# Altium PCB PCB_DimmerBard.PcbDoc
Units mil, origin at the board's own origin, x right, y up, seen from the top; angles counter-clockwise.
Board outline 2165.35 x 1299.21 mil, 3 copper layers (Top Layer, Mid-Layer 2, Bottom Layer); 65 components, 108 nets, 189 pads, 58 vias.
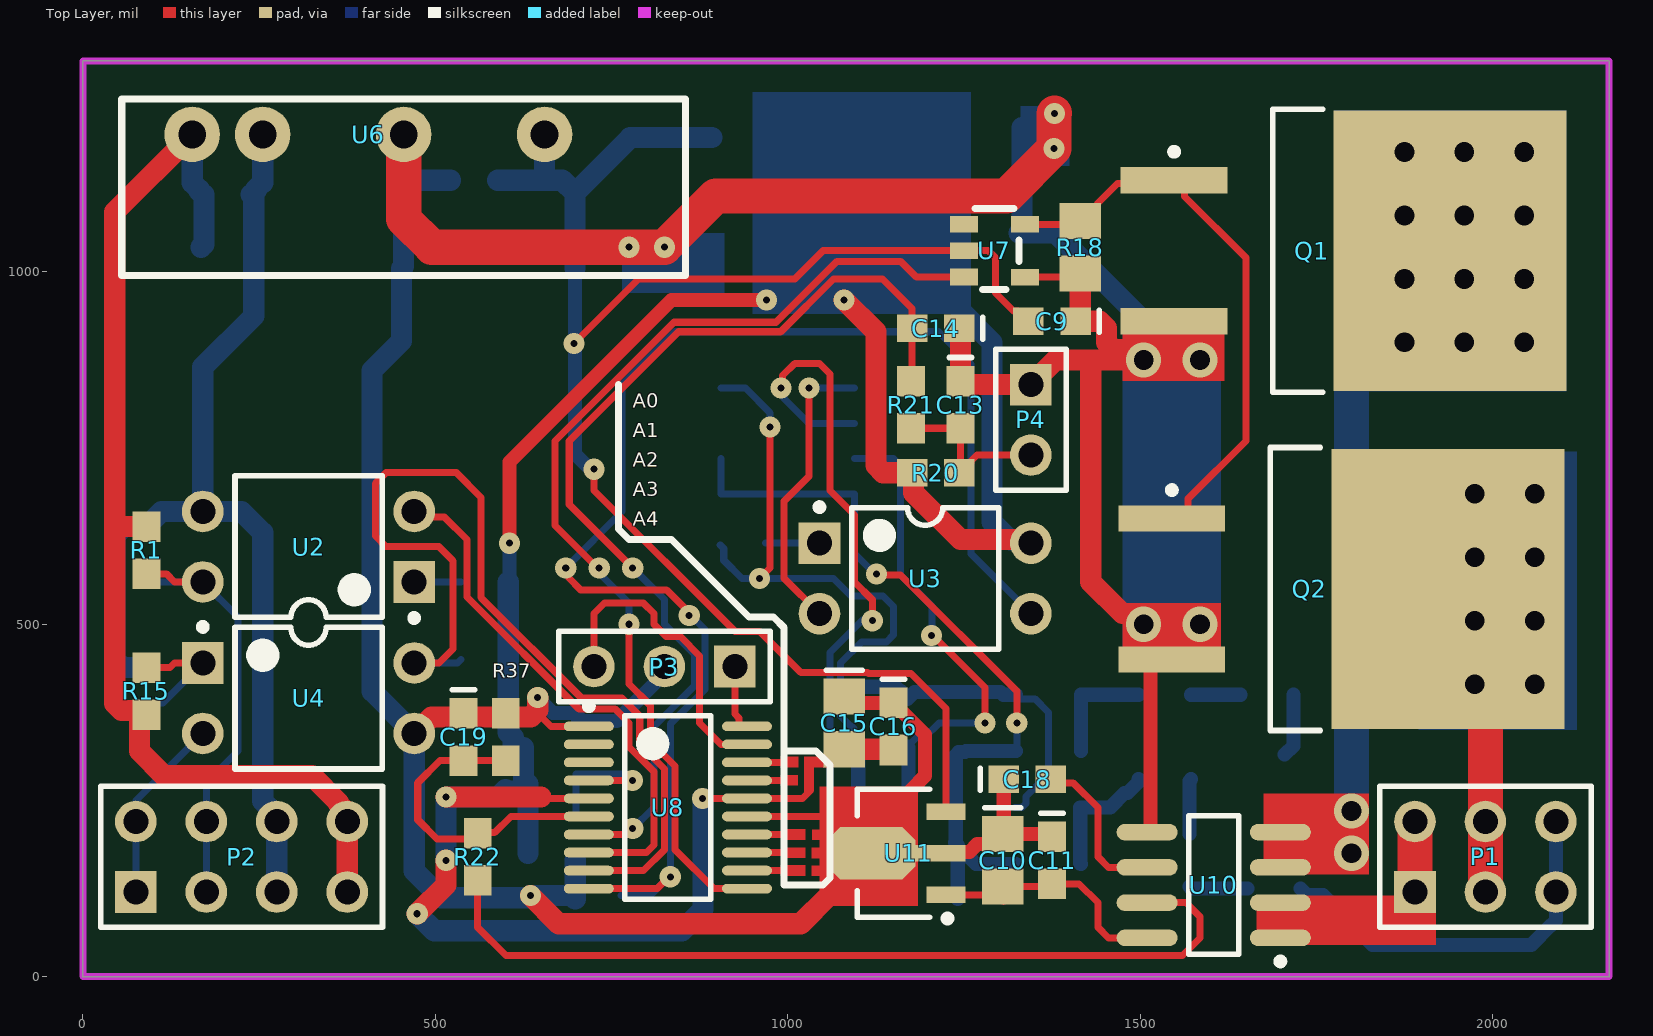
[diagram p0: Top Layer view]
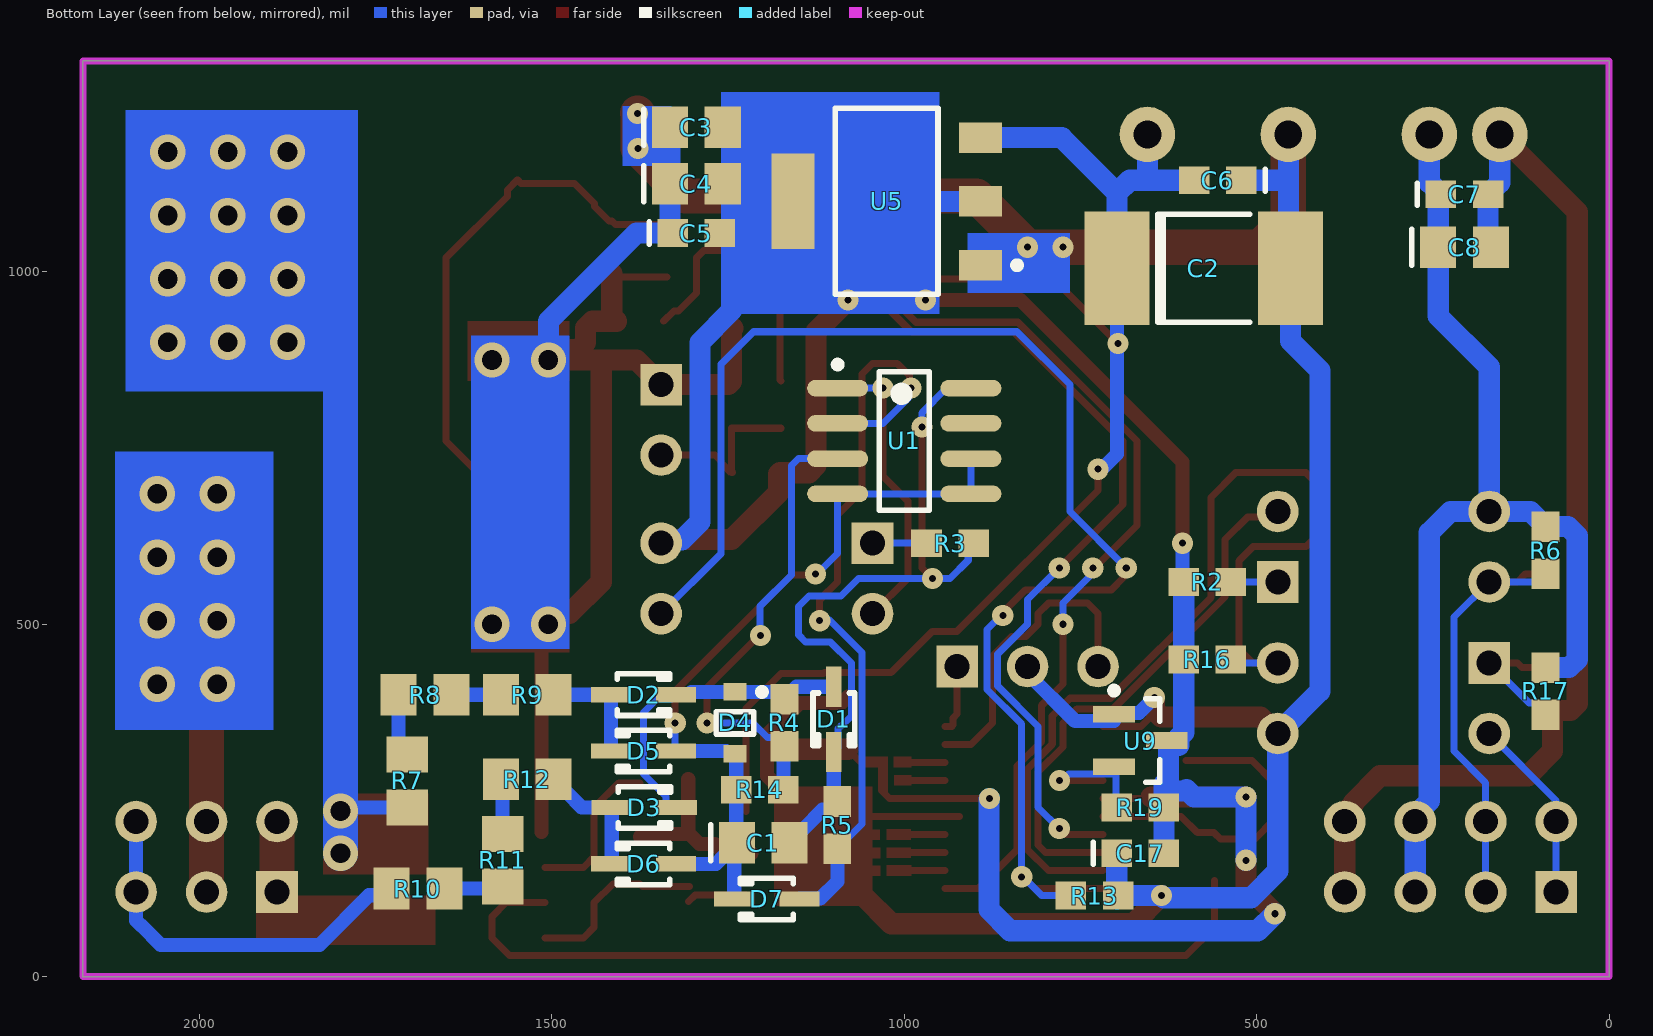
[diagram p1: Bottom Layer view, seen from below]

## Layer stack, top to bottom
Top Solder: solder mask 0.4, Solder Resist, Dk 3.5
Top Layer: signal copper 1.4
Dielectric 1: dielectric 12.6, FR-4, Dk 4.8
Mid-Layer 2: signal copper 1.4
Dielectric2: dielectric 12.6, FR-4, Dk 4.8
Bottom Layer: signal copper 1.4
Bottom Solder: solder mask 0.4, Solder Resist, Dk 3.5

## Board outline
0,0 0,1299.21 2165.35,1299.21 2165.35,0

## Design rules (kind name [scope] priority, off if disabled: settings)
BoardOutlineClearance [All] p1: gap=11.81 ignorepadtopadclearanceinfootprint=FALSE except(15.75: Arc-SplitBarrior Arc-SplitContinuation Track-SplitBarrior Track-SplitContinuation SMDPad-SplitBarrior SMDPad-SplitContinuation THPad-SplitBarrior THPad-SplitContinuation Via-SplitBarrior Via-SplitContinuation Fill-SplitBarrior Fill-SplitContinuation Poly-SplitBarrior Poly-SplitContinuation Region-SplitBarrior Region-SplitContinuation Text-SplitBarrior Text-SplitContinuation)
Clearance "Clearance Different Nets" [All] p1: gap=7.87 ignorepadtopadclearanceinfootprint=FALSE except(3.5: Arc-Arc Arc-Track Arc-SMDPad Track-Track Track-SMDPad; 5: SMDPad-SMDPad SMDPad-Via THPad-Via Via-Via; 10: Arc-Via Arc-Text Track-Via Track-Text SMDPad-Text THPad-Text Via-Text Fill-Text Poly-Text Region-Text Text-Text; 19.68: THPad-THPad Via-Hole)
Clearance "Clearance Same Nets" [All] p2: gap=7.87 ignorepadtopadclearanceinfootprint=FALSE except(3.5: Arc-Arc Arc-Track Arc-SMDPad Track-Track Track-SMDPad SMDPad-SMDPad; 5: SMDPad-Via THPad-Via; 10: Arc-Via Arc-Text Track-Via Track-Text SMDPad-Text THPad-Text Via-Via Via-Text Fill-Text Poly-Text Region-Text Text-Text)
Clearance "Clearance Bottom Layer" [OnLayer('Bottom Layer')] p3: gap=8 ignorepadtopadclearanceinfootprint=TRUE except(10: Arc-Text Track-Text SMDPad-Text THPad-Text Via-Text Fill-Text Poly-Text Region-Text Text-Text)
Clearance "Clearance Top Layer" [OnLayer('Top Layer')] p4: gap=8 ignorepadtopadclearanceinfootprint=TRUE except(10: Arc-Text Track-Text SMDPad-Text THPad-Text Via-Text Fill-Text Poly-Text Region-Text Text-Text)
HoleSize [All] p1: absolutevalues=TRUE maxlimit=248.03 minlimit=7.87 maxpercent=80.000 minpercent=20.000
MinimumAnnularRing [All] p1: minimumring=5.12
MinimumSolderMaskSliver [All] p1: minsoldermaskwidth=3.94
PolygonConnect PolygonConnect_1 [All] p1: thpad.connectstyle=Relief thpad.reliefconductorwidth=20 thpad.reliefentries=4 thpad.polygonreliefangle="90 Angle" thpad.airgapwidth=10 smdpad.connectstyle=Relief smdpad.reliefconductorwidth=20 smdpad.reliefentries=4 smdpad.polygonreliefangle="90 Angle" smdpad.airgapwidth=10 via.connectstyle=Direct via.reliefconductorwidth=20 via.reliefentries=4 via.polygonreliefangle="90 Angle" via.airgapwidth=10
RoutingCorners [All] p1: cornerstyle=Round minsetback=100 maxsetback=100
RoutingVias [All] p1: holewidth=19.68 width=39.37 viastyle="Through Hole" minholewidth=7.87 minwidth=13.78 maxholewidth=39.37 maxwidth=78.74
SilkToSilkClearance [All] p1: silktosilkclearance=3.94
SilkToSolderMaskClearance [IsPad] p1: minsilkscreentomaskgap=3.94 clearancetoexposedcopper=TRUE
SolderMaskExpansion [All] p1: expansion=4 istentingtop=FALSE
SupplyNets "Schematic Supply Nets_10" [InNet('GND1')] p1: voltage=0.000
SupplyNets "Schematic Supply Nets_9" [InNet('3V3')] p2: voltage=0.000
SupplyNets "Schematic Supply Nets_8" [InNet('L1')] p3: voltage=0.000
SupplyNets "Schematic Supply Nets_7" [InNet('+12_1')] p4: voltage=0.000
SupplyNets "Schematic Supply Nets_6" [InNet('GND')] p5: voltage=0.000
SupplyNets "Schematic Supply Nets_5" [InNet('L1IN')] p6: voltage=0.000
SupplyNets "Schematic Supply Nets_4" [InNet('GND2')] p7: voltage=0.000
SupplyNets "Schematic Supply Nets_3" [InNet('5V')] p8: voltage=0.000
SupplyNets "Schematic Supply Nets_2" [InNet('+3V3_1')] p9: voltage=0.000
SupplyNets "Schematic Supply Nets_1" [InNet('+12V')] p10: voltage=0.000
SupplyNets "Schematic Supply Nets" [InNet('12V')] p11: voltage=0.000
Width [All] p1: maxlimit=100 minlimit=3.5 preferedwidth=15
25 further rules are at their usual default settings.

## Components (designator, comment, footprint, x,y, rotation, side; value= is the part's Value field where it differs from the comment)
C1 "" 0805 1200,190 r180 bottom value=10uF
C2 "47uF" H 575,1005 r180 bottom
C3 "C0805" 0805 1295,1205 r180 bottom value=10uF
C4 "C0805" 0805 1295,1125 r180 bottom value=10uF
C5 "C0603" 0603 1295,1055 r180 bottom value=100nF
C6 "C0603" 0603 555,1130 r0 bottom value=100nF
C7 "C0603" 0603 205,1110 r180 bottom value=100nF
C8 "C0805" 0805 205,1035 r180 bottom value=10uF
C9 "C0603" 0603 1375,930 r180 top value=100nF
C10 "" 0805 1305,165 r270 top value=4u7
C11 "" 0603 1375,165 r270 top value=100nF
C13 "C0603" 0603 1245,811.54 r270 top value=100nF
C14 "C0603" 0603 1210,920 r180 top value=100nF
C15 "C0805" 0805 1080,360 r270 top value=10uF
C16 "C0603" 0603 1150,355 r270 top value=100nF
C17 "C0603" 0603 665,175 r180 bottom value=100nF
C18 "" 0603 1340,280 r0 top value=10nF
C19 "" 0603 540,340 r270 top value=100nF
D1 "1N4148" SOD323 1100,365 r270 bottom
D2 "1N4148" SOD323 1370,400 r180 bottom
D3 "1N4148" SOD323 1368.74,240 r180 bottom
D4 "Z12V" ONSC-SOD-323-2-477-02_V 1240,360 r270 bottom
D5 "1N4148" SOD323 1370,320 r0 bottom
D6 "1N4148" SOD323 1370,160 r0 bottom
D7 "1N4148" SOD323 1195,110 r0 bottom
P1 "Header 3X2" HDR2X3 1890,120 r0 top
P2 "CTRL" HDR2X4 75,120 r0 top
P3 "Header 3" HDR1X3 925,440 r180 top
P4 "Header 2" HDR1X2 1345,840 r270 top
Q1 "16N65" INF-PG-TO263-3-2_N 1788.43,1030 r0 top
Q2 "16N65" INF-PG-TO263-3-2_N 1785.16,550 r0 top
R1 "" ERA-0603 90,605 r270 top value=2K2
R2 "10K" ERA-0603 570,560 r0 bottom value=330R
R3 "" ERA-0603 935,615 r180 bottom value=1K
R4 "3K9" ERA-0603 1170,360 r90 bottom
R5 "" ERA-0603 1095,215 r90 bottom value=39K
R6 "" ERA-0603 90,605 r90 bottom value=820R
R7 "" ERA-0805 1705,277.6 r90 bottom value=18K
R8 "" ERA-0805 1680,400 r180 bottom value=18K
R9 "" ERA-0805 1535,400 r180 bottom value=18K
R10 "" ERA-0805 1690,125 r180 bottom value=18K
R11 "" ERA-0805 1570,165 r90 bottom value=18K
R12 "" ERA-0805 1535,280 r180 bottom value=18K
R13 "" ERA-0603 730,115 r0 bottom value=2K2
R14 "39K" ERA-0603 1205,265 r180 bottom
R15 "" ERA-0603 90,405 r90 top value=1K2
R16 "10K" ERA-0603 570,450 r0 bottom value=1K
R17 "" ERA-0603 90,405 r90 bottom value=470R
R18 "100K" ERA-0805 1415,1035 r90 top
R19 "10K" ERA-0603 665,240 r180 bottom
R20 "10K" ERA-0603 1210,715 r180 top
R21 "1K" ERA-0603 1175,811.54 r270 top
R22 "" ERA-0603 560,170 r270 top value=1K
R37 "" ERA-0603 600,340 r90 top value=2K
U1 "LM393MX" M08A_N 1000,760 r180 bottom
U2 "PC817 DIP4" DIP-4 320,610 r180 top
U3 "PC817 DIP4" DIP-4 1195,565 r0 top
U4 "PC817 DIP4" DIP-4 320,395 r0 top
U5 "REG1117-3.3" ZZ311 1025,1100 r90 bottom
U6 "IF1212S-1W" IF1212S-1W 155,1195 r0 top
U7 "COS1415" SOT23-5 1356.3,1095 r180 top
U8 "STM32F030F4P6" STM-TSSOP20_N 830,240 r0 top
U9 "TLV803MDBZR" DBZ3_N 665,335 r180 bottom
U10 "MCS1802GS-10-Z" SOIC-SN8_N 1604.49,130 r180 top
U11 "L78L05ACUTR" SOT-89_N 1150,175 r180 top

## Footprints (in the part's own frame and the unit in brackets; to place one, negate y for a bottom-side part, rotate by r counter-clockwise, add the part's x,y. Pads: shape width x height; smd on the part's side, far side on the other; paste and mask are expansions set on the pad)
0603 [mm] "Chip Capacitor; Body 1.6 x 0.8 mm (LxW typ)"
  rect 1.1x1 smd: 1(-0.85,0) 2(0.85,0)
  silkscreen extent -1.7,-0.4 -1.7,0.4
0805 [mm] "Chip Capacitor; Body 2.0 x 1.2 mm (LxW typ)"
  rect 1.3x1.5 smd: 1(-0.95,0) 2(0.95,0)
  silkscreen extent -1.9,-0.65 -1.9,0.65
DBZ3_N [mm] "SOT23, 3-Leads, Body 2.9x1.3mm, Pitch 0.95mm, Lead Span 2.4mm, IPC Medium Density"
  rect 1.5x0.6 smd: 1(-0.95,0.95) 2(-0.95,-0.95) 3(0.95,0)
  silkscreen extent -1.07,-1.5 0.7,1.92, body extent -0.7,-1.52 0.7,1.52, height 1.12
DIP-4 [mm] "DIP; 4 Leads; Row Spacing 7.62 mm; Pitch 2.54 mm"
  rect 1.5x1.5 hole 0.9: 1(-3.81,1.27)
  round 1.5 hole 0.9: 2(-3.81,-1.27) 3(3.81,-1.27) 4(3.81,1.27)
  silkscreen extent -3.94,-2.55 2.65,2.69, body extent -3.15,-2.5 3.15,2.5, height 5.6
ERA-0603 [mm] "Chip Resistor; Body 1.6 x 0.8 mm (LxW typ)"
  rect 1.1x1 smd: 1(-0.85,0) 2(0.85,0)
ERA-0805 [mm] "Chip Resistor; Body 2 x 1.3 mm (LxW typ)"
  rect 1.3x1.5 smd: 1(-0.95,0) 2(0.95,0)
H [mm] "Chip Capacitor; Body 7.24 x 3.81 mm (LxW typ)"
  rect 2.35x4.1 smd: 1(-3.125,0) 2(3.125,0)
  silkscreen extent -1.65,-1.95 1.65,1.95
HDR1X2 [mm] "Connector; Header; 2 Position"
  rect 1.5x1.5 hole 0.9: 1(0,0)
  round 1.5 hole 0.9: 2(2.54,0)
  silkscreen extent -1.27,-1.27 3.81,1.27
HDR1X3 [mm] "Connector; Header; 3 Position"
  rect 1.5x1.5 hole 0.9: 1(0,0)
  round 1.5 hole 0.9: 2(2.54,0) 3(5.08,0)
  silkscreen extent -1.27,-1.27 6.35,1.27
HDR2X3 [mm] "Connector; Header; 3x2 Position"
  rect 1.5x1.5 hole 0.9: 1(0,0)
  round 1.5 hole 0.9: 2(0,2.54) 3(2.54,0) 4(2.54,2.54) 5(5.08,0) 6(5.08,2.54)
  silkscreen extent -1.27,-1.27 6.35,3.81
HDR2X4 [mm] "Connector; Header; 4x2 Position"
  rect 1.5x1.5 hole 0.9: 1(0,0)
  round 1.5 hole 0.9: 2(0,2.54) 3(2.54,0) 4(2.54,2.54) 5(5.08,0) 6(5.08,2.54) 7(7.62,0) 8(7.62,2.54)
  silkscreen extent -1.27,-1.27 8.89,3.81
IF1212S-1W [mm] "Isolated DC/DC converter"
  round 2 hole 1: 1(0,0) 2(2.54,0) 4(7.62,0) 6(12.7,0)
  silkscreen extent -2.54,-5.08 17.78,1.27, body extent -2.54,-5.08 17.78,1.27, height 10
INF-PG-TO263-3-2_N [mm] "DPAK, 3-Leads, Body 10x9.25mm, Pitch 2.54mm, IPC Medium Density"
  rect 3.85x0.95 smd: 1(-6.1,2.54) 3(-6.1,-2.54)
  rect 8.4x10.1 smd: 2(3.85,0)
  silkscreen extent -6.22,-5.1 -0.75,5.1, body extent -2.55,-5.1 6.9,5.1, height 4.4
M08A_N [mm] "SOIC, 8-Leads, Body 4.9x3.9mm, Pitch 1.27mm, IPC Medium Density"
  oval 2.2x0.6 smd: 1(-2.4,1.905) 2(-2.4,0.635) 3(-2.4,-0.635) 4(-2.4,-1.905) 5(2.4,-1.905) 6(2.4,-0.635) 7(2.4,0.635) 8(2.4,1.905)
  silkscreen extent -2.53,-2.5 0.9,2.88, body extent -2,-2.5 2,2.5, height 1.75
ONSC-SOD-323-2-477-02_V [mm] "SOD, 2-Leads, Body 1.7x1.25mm"
  rect 0.63x0.83 smd: 1(-1.115,0) 2(1.115,0)
  silkscreen extent -1.24,-0.67 0.4,1.09, body extent -0.85,-0.63 0.85,0.63, height 1.06
SOD323 [mm] "SOD-323/SC-76; 2 Leads; Body 1.7 x 1.3 mm, (LxW)"
  rect 1.45x0.55 smd: 1(1.175,0) 2(-1.175,0)
  silkscreen extent -0.95,-0.75 0.95,0.75
SOIC-SN8_N [mm] "SOIC, 8-Leads, Body 4.9x3.8mm, Pitch 1.27mm, IPC Medium Density"
  oval 2.2x0.6 smd: 1(-2.4,1.905) 2(-2.4,0.635) 3(-2.4,-0.635) 4(-2.4,-1.905) 5(2.4,-1.905) 6(2.4,-0.635) 7(2.4,0.635) 8(2.4,1.905)
  silkscreen extent -2.53,-2.5 0.9,2.88, body extent -2,-2.5 2,2.5, height 1.75
SOT23-5 [mm] "SMD small outline"
  rect 1x0.6 smd paste+0 mask+0.05: 1(2.7,0.701) 2(2.7,1.651) 3(2.7,2.601) 4(0.5,2.601) 5(0.5,0.701)
  silkscreen extent 0.71,0.13 2.3,3.05
SOT-89_N [mm] "SOT89, 3-Leads, Body 4.5x2.4 mm, Pitch 1.5mm, Lead Span 4.1mm, IPC Medium Density"
  rect 1.4x0.6 smd: 1(-1.9,1.5) 3(-1.9,-1.5)
  rect 1.8x0.6 smd: 2(-1.7,0)
  oct 3.2x1.9 smd: 2(0.8,0)
  silkscreen extent -2.08,-2.3 1.3,2.47, body extent -1.3,-2.3 1.3,2.3, height 1.6
STM-TSSOP20_N [mm] "SOP, 20-Leads, Body 6.6x4.5mm, Pitch 0.65mm, IPC Medium Density"
  oval 1.8x0.35 smd: 1(-2.85,2.925) 2(-2.85,2.275) 3(-2.85,1.625) 4(-2.85,0.975) 5(-2.85,0.325) 6(-2.85,-0.325) 7(-2.85,-0.975) 8(-2.85,-1.625) 9(-2.85,-2.275) 10(-2.85,-2.925) 11(2.85,-2.925) 12(2.85,-2.275) 13(2.85,-1.625) 14(2.85,-0.975) 15(2.85,-0.325) 16(2.85,0.325) 17(2.85,0.975) 18(2.85,1.625) 19(2.85,2.275) 20(2.85,2.925)
  silkscreen extent -2.97,-3.3 1.55,3.77, body extent -2.25,-3.3 2.25,3.3, height 1.2
ZZ311 [mm] "SOT-223/SC-73; 4 Leads; Body 6.7 x 7.3 mm, inc. leads (LxW max)"
  rect 1.1x1.55 smd: 1(-2.3,-3.375) 2(0,-3.375) 3(2.3,-3.375)
  rect 3.45x1.55 smd: 4(0,3.375)
  silkscreen extent -3.35,-4.82 3.35,1.85

## Part data
C1 C10: library part C0805, "Ceramic Chip Capacitor - Standard", PackageDocument=Mar-2001, Code_IPC=2012[0805], Code_JEITA=0805, ComponentLink1Description="Manufacturer Link", ComponentLink1URL=http://www.kemet.com/, ComponentLink2Description=Datasheet, ComponentLink2URL=http://www.kemet.com/kemet/web/homepage/kechome.nsf/vapubfilesname/F3102TA.pdf/$file/F3102TA.pdf, DatasheetDocument=Mar-2001, LatestRevisionDate=19-Mar-2004, LatestRevisionNote="Silkscreen size reduced.", Note="Footprint corresponds to dimensions for bulk cassette packaging. This case size has tightened tolerances.", PackageReference=0805, Published=17-Jul-2002, Publisher="Altium Limited"
C2: library part 194D476X0015H2, "Midget Conformal Coated Solid Tantalum Chip Capacitor: 47uF, 20% Tolerance, 15 WVDC @ +85°C, Surge = 20V", ComponentLink1Description="Manufacturer Link", ComponentLink1URL=http://www.vishay.com/, ComponentLink2Description=Datasheet, ComponentLink2URL=http://www.vishay.com/docs/40000/194d.pdf, DatasheetDocument=05-Jul-2002, Note="See Data Sheet for full range of components", PackageReference=H, Published=19-Mar-2004, Publisher="Altium Limited"
C3 C4 C5 C6 C7 C8 C9 C13 C14 C15 C16 C17: "Ceramic Chip Capacitor - Standard", PackageDocument=Mar-2001, ComponentLink1Description="Manufacturer Link", ComponentLink1URL=http://www.kemet.com/, ComponentLink2Description=Datasheet, ComponentLink2URL=http://www.kemet.com/kemet/web/homepage/kechome.nsf/vapubfilesname/F3102TA.pdf/$file/F3102TA.pdf, DatasheetDocument=Mar-2001, LatestRevisionDate=19-Mar-2004, LatestRevisionNote="Silkscreen size reduced.", Note="Footprint corresponds to dimensions for bulk cassette packaging. This case size has tightened tolerances.", Published=17-Jul-2002, Publisher="Altium Limited"
  C3 C4 C8 C15: Code_IPC=2012[0805], Code_JEITA=0805, PackageReference=0805
  C5 C6 C7 C9 C13 C14 C16 C17: Code_IPC="1608 [0603]", Code_JEITA=0603, PackageReference=0603
C11 C18 C19: library part C0603, "Ceramic Chip Capacitor - Standard", PackageDocument=Mar-2001, Code_IPC="1608 [0603]", Code_JEITA=0603, ComponentLink1Description="Manufacturer Link", ComponentLink1URL=http://www.kemet.com/, ComponentLink2Description=Datasheet, ComponentLink2URL=http://www.kemet.com/kemet/web/homepage/kechome.nsf/vapubfilesname/F3102TA.pdf/$file/F3102TA.pdf, DatasheetDocument=Mar-2001, LatestRevisionDate=19-Mar-2004, LatestRevisionNote="Silkscreen size reduced.", Note="Footprint corresponds to dimensions for bulk cassette packaging. This case size has tightened tolerances.", PackageReference=0603, Published=17-Jul-2002, Publisher="Altium Limited"
D1 D2 D3 D5 D6 D7: library part 1PS76SB10, "Schottky Barrier Diode", ComponentLink1Description="Manufacturer Link", ComponentLink1URL=http://www.semiconductors.philips.com/, ComponentLink2Description=Datasheet, ComponentLink2URL=http://www.semiconductors.philips.com/acrobat/datasheets/1PS76SB10_2.pdf, DatasheetVersion=14-Oct-1996, LatestRevisionDate=19-Mar-2004, LatestRevisionNote="Silkscreen size reduced.", PackageDescription="SOD-323/SC-76; 2 Leads; Body 1.7 x 1.3 mm, (LxW)", PackageReference=SOD323, PackageVersion=May-1999, Published=17-Sep-2003, Publisher="Altium Limited"
D4: library part SZMM3Z12VT1G, "Zener Voltage Regulator, 300 mW, 2-Pin SOD-323, Pb-Free, Tape and Reel", Manufacturer="On Semiconductor", Supplier Part Number 1=SZMM3Z12VT1G-ND, ComponentLink1Description="Manufacturer URL", ComponentLink1URL=http://www.onsemi.com/, ComponentLink2Description=Datasheet, ComponentLink2URL=http://www.onsemi.cn/pub_link/Collateral/MM3Z2V4T1-D.PDF, ComponentLink3Description="Package Specification", ComponentLink3URL=http://www.onsemi.com/pub_link/Collateral/477-02.PDF.1, DatasheetVersion="Rev. 9", Mounting Technology="Surface Mount", P Max (W)=0.3, PackageDescription="2-Pin SOD, Body 1.7 x 1.25 mm", PackageReference=SOD-323-2-477-02, PackageVersion="Rev. H, 03/2007", Packing="Tape and Reel", PartNumber=SZMM3Z12VT1G, RoHS=Pb-Free, Supplier 1=Digi-Key, Supplier 2=Mouser, Supplier Part Number 2=863-SZMM3Z12VT1G, VZ Typ (V)=12
P1: "Header, 3-Pin, Dual row", LatestRevisionDate=17-Jul-2002, LatestRevisionNote="Re-released for DXP Platform.", Publisher="Altium Limited"
P2: library part "Header 4X2", "Header, 4-Pin, Dual row", LatestRevisionDate=17-Jul-2002, LatestRevisionNote="Re-released for DXP Platform.", Publisher="Altium Limited"
P3: "Header, 3-Pin", LatestRevisionDate=17-Jul-2002, LatestRevisionNote="Re-released for DXP Platform.", Publisher="Altium Limited"
P4: "Header, 2-Pin", LatestRevisionDate=17-Jul-2002, LatestRevisionNote="Re-released for DXP Platform.", Publisher="Altium Limited"
Q1 Q2: library part "IPB020NE7N3 G", "N-Channel OptiMOS 3 Power-Transistor, 75 V VDS, 120 A ID, -55 to 175 degC, PG-TO263-3-2, Reel, Green", Manufacturer=Infineon, Supplier Part Number 1=726-IPB020NE7N3GXT, ComponentLink1Description="Manufacturer URL", ComponentLink1URL=http://www.infineon.com/, ComponentLink2Description=Datasheet, ComponentLink2URL=http://www.infineon.com/dgdl/IPB020NE7N3_Rev2.2.pdf?folderId=db3a304313b8b5a60113cee8763b02d7&fileId=db3a304320d39d590121e31c838554d3, ComponentLink3Description="Package Specification", ComponentLink3URL=http://www.infineon.com/dgdl/BTS141TC_DS_10.pdf?folderId=db3a3043163797a6011667aa084c0e01&fileId=db3a3043242ebc9e01242f43f58b003e&location=en.Products.Automotive_ICs.Smart_High-_and_Low-Side_Switches.HITFET___TEMPFET__-_Smart_Low-Side_Switches.DATASHEET.BTS141TC_DS_10.pdf, DatasheetVersion="Rev. 2.2", Green=TRUE, Halogen-free=TRUE, ID (max)="120 A", IDpuls (max)="480 A", Mounting Technology="Surface Mount", PackageDescription="3-Pin Plastic (Green) Transistor Single Outline Package, 10 x 9.25 mm Body, 2.54 mm Pitch", PackageReference=PG-TO263-3-2, PackageVersion=Jul-09, Packing=Reel, PartNumber="IPB020NE7N3 G", Polarity=N, Ptot (max)="300 W", QG="155 nC", RDS (on) (max)="2 mOhm", Rth="0.5 K/W", RthJA (max)="62 K/W", RthJC (max)="0.5 K/W", Supplier 1=Mouser, Supplier 2=Digi-Key, Supplier 3=Digi-Key, Supplier 4=Digi-Key, Supplier Part Number 2="IPB020NE7N3 GTR-ND", Supplier Part Number 3="IPB020NE7N3 GCT-ND", Supplier Part Number 4="IPB020NE7N3 GDKR-ND", VDS (max)="75 V", VGS(th) (max)="3.8 V", VGS(th) (min)="2.3 V"
R1 R2 R3 R4 R5 R6 R13 R14 R15 R16 R17 R19 R20 R21 R22 R37: library part ERA3Y, "Rectangular Thick Film Chip Resistor, 10 Ohm to 330k Ohm Range, 0.1% and 0.5% Tolerance, 0603 Size, 0.063 W", PackageDocument=Mar-2003, Code_IPC="1608 [0603]", ComponentLink1Description="Manufacturer Link", ComponentLink1URL=http://www.panasonic.com/industrial/components/resistive_products.htm, ComponentLink2Description=Datasheet, ComponentLink2URL=http://www.panasonic.com/industrial/components/pdf/AOA0000CE8.pdf, LatestRevisionDate=19-Mar-2004, LatestRevisionNote="Silkscreen size reduced.", Note="If flow soldering, adjust pad width of PCB Footprint to 0.7 - 0.8 times the width of the resistor.", PackageReference=ERA-0603, Published=17-Dec-2003, Publisher="Altium Limited"
R7 R8 R9 R10 R11 R12: library part ERA6Y, "Rectangular Thick Film Chip Resistor, 10 Ohm to 1M Ohm Range, 0.1% and 0.5% Tolerance, 0805 Size, 0.1 W", PackageDocument=Mar-2003, Code_IPC="2012 [0805]", ComponentLink1Description="Manufacturer Link", ComponentLink1URL=http://www.panasonic.com/industrial/components/resistive_products.htm, ComponentLink2Description=Datasheet, ComponentLink2URL=http://www.panasonic.com/industrial/components/pdf/AOA0000CE8.pdf, LatestRevisionDate=19-Mar-2004, LatestRevisionNote="Silkscreen size reduced.", Note="If flow soldering, adjust pad width of PCB Footprint to 0.7 - 0.8 times the width of the resistor.", PackageReference=ERA-0805, Published=17-Dec-2003, Publisher="Altium Limited"
R18: library part ERAS, "Metal Film Thermosensitive Chip Resistor, 0.56 Ohm to 10k Ohm Range, 5% Tolerance, 0805 Size, 0.1 W", PackageDocument=Mar-2003, Code_IPC="2012 [0805]", ComponentLink1Description="Manufacturer Link", ComponentLink1URL=http://www.panasonic.com/industrial/components/resistive_products.htm, ComponentLink2Description=Datasheet, ComponentLink2URL=http://www.panasonic.com/industrial/components/pdf/AOF0000CE1.pdf, LatestRevisionDate=19-Mar-2004, LatestRevisionNote="Silkscreen size reduced.", Note="If flow soldering, adjust pad width of PCB Footprint to 0.7 - 0.8 times the width of the resistor.", PackageReference=ERA-0805, Published=17-Dec-2003, Publisher="Altium Limited"
U1: "Low Power Low Offset Voltage Dual Comparator, 8-pin Narrow SOIC", Manufacturer="National Semiconductor", PackageTopMarking=NSZXTT*LM*393M, PowerWise=N, Code_IPC=SOIC127P600-8, Code_JEDEC=MS-012-AA, ComponentLink1Description="Manufacturer URL", ComponentLink1URL=http://www.national.com/, ComponentLink2Description="LM393 Datasheet", ComponentLink2URL=http://www.national.com/ds/LM/LM393.pdf, ComponentLink3Description="LM393 Web Page", ComponentLink3URL=http://www.national.com/pf/LM/LM393.html, ComponentLink4Description="M08A Package Page", ComponentLink4URL=http://www.national.com/packaging/folders/m08a.html, CompType=Comparator, DatasheetVersion=Aug-2002, High-Reliability=Y, PackageDescription="SOIC Narrow, 4.9 x 3.9 x 1.45mm, 8 Lead, 1.27mm Pitch", PackageReference=M08A, PackageVersion="revM, May-2009", PartNumber=LM393MX, PinCount=8, RoHS=N
U2 U3 U4: "4-Pin Phototransistor Optocoupler", DatasheetVersion=Nov-2003, LatestRevisionDate=04-Mar-2005, LatestRevisionNote="Sch pins 3 & 4 Swapped.", PackageReference=DIP-4, Published=24-Mar-1999, Publisher="Altium Limited"
U5: "800mA and 1A Low Dropout Positive Regulator 2.85V, 3.3V, 5V, and Adjustable", ComponentLink1Description="Manufacturer Link", ComponentLink1URL=http://www.ti.com/, ComponentLink2Description=Datasheet, ComponentLink2URL=http://www-s.ti.com/sc/ds/REG1117.pdf, DatasheetVersion=Sep-1997, LatestRevisionDate=17-Jul-2002, LatestRevisionNote="Re-released for DXP Platform.", PackageDescription="SOT-223/SC-73; 4 Leads; Body 6.7 x 7.3 mm, inc. leads (LxW max)", PackageReference=ZZ311, PackageVersion=revC, Published=8-Jun-2000, Publisher="Altium Limited"
U6: "1W isolated dc dc converter"
U7: "1.5A Single-Channel / High-Speed Power MOSFETDriver"
U8: "ARM Cortex-M0 32-bit MCU, 16 KB Flash, 4 KB Internal RAM, 15 I/Os, 20-pin TSSOP, -40 to 85 degC, Tube", I/Os (High Current)=15, Operating Frequency(F) (Processor speed) (MHz)=48, Supplier Part Number 1=497-14044-5-ND, Supply Voltage(Vcc) min (V)=2.4, ComponentLink1Description="Manufacturer URL", ComponentLink1URL=http://www.st.com/web/en/home.html, ComponentLink2Description=Datasheet, ComponentLink2URL=http://www.st.com/st-web-ui/static/active/en/resource/technical/document/datasheet/DM00088500.pdf, ComponentLink3Description="Package Specification", ComponentLink3URL=http://www.st.com/st-web-ui/static/active/en/resource/technical/document/datasheet/DM00065136.pdf, Core="ARM Cortex-M0", DatasheetVersion="Rev. 1", FLASH Size (Prog) (kB)=16, Internal RAM Size (kB)=4, Mounting Technology="Surface Mount", PackageDescription="20-Pin Thin Shrink Small Outline Package, 6.5 x 4.4 mm Body, 0.65 mm Pitch", PackageReference=TSSOP20, PackageVersion="Rev. 1, 11/2012", Packing=Tube, PartNumber=STM32F030F4P6, Supplier 1=Digi-Key, Supplier 2=Newark, Supplier 3=Mouser, Supplier Part Number 2=06X3648, Supplier Part Number 3=511-STM32F030F4P6
U9: "Voltage Supervisor with Active-Low, Open Drain Reset, 1 Supply Monitored, -40 to 125 degC, 3-pin SOT-23 (DBZ), Green (RoHS & no Sb/Br)", Manufacturer="Texas Instruments", Rating=Catalog, Supplier Part Number 1=296-29194-2-ND, Threshold Voltage 1 (typ)(Typ)(V)=4.38, # of supplies monitored=1, Code_JEDEC=TO-236-AB, ComponentLink1Description=Datasheet, ComponentLink1URL=http://www.ti.com/general/docs/lit/getliterature.tsp?genericPartNumber=TLV803M&fileType=pdf, DatasheetVersion=SBVS157B, Iq(Typ)(uA)=9, Mounting Technology="Surface Mount", Output Driver Type / Reset Output="Active-low, Open-drain", PackageDescription="3-Pin Plastic Small-Outline Package, 0.95 mm Pitch, 2.4 mm Lead Span", PackageReference=DBZ3, PackageVersion="revB, Apr-2005", PartNumber=TLV803MDBZR, Reset Threshold Accuracy(%)=2, SubFamily="Supervisor and Reset IC", Supplier 1=Digi-Key, Supplier 2=Digi-Key, Supplier 3=Digi-Key, Supplier 4=Newark, Supplier 5=Mouser, Supplier Part Number 2=296-29194-1-ND, Supplier Part Number 3=296-29194-6-ND, Supplier Part Number 4=58T0286, Supplier Part Number 5=595-TLV803MDBZR, Time Delay(ms)=200, VCC(Max)(V)=6, VCC(Min)(V)=1.1
U10: library part ACS71240
U11: "Positive Voltage Regulator, 5V, 4-Pin SOT-89, Tape and Reel", ComponentLink1Description="Manufacturer URL", ComponentLink1URL=http://www.st.com, ComponentLink2Description=Datasheet, ComponentLink2URL=http://www.st.com/internet/com/TECHNICAL_RESOURCES/TECHNICAL_LITERATURE/DATASHEET/CD00000446.pdf, DatasheetVersion=Feb-2011, PackageDescription="3-Pin SOT-89 Package 1.5 mm Pitch, 4.1 mm Lead Span", PackageReference=SOT-89, PackageVersion=2011, PartNumber=L78L05ACUTR

## Via types
v1: diameter 30, hole 10, Top Layer to Bottom Layer, 32 vias
v2: diameter 50, hole 28, Top Layer to Bottom Layer, 26 vias

## Nets (pads, with @x,y where several pads share a name; then routed paths per layer and width w, separated by ;. In a path a pad name is that pad's centre, name@x,y a point inside that pad or via, vN(x,y) a via of type N, cw(c..) or ccw(c..) an arc to the next point about the centre after c; other vN are vias at no path point)
3V3: 
5V: 
12V: 
+3V3_1: C3.2 C4.2 C5.2 C15.2 C16.2 C17.2 R2.2 R16.2 R19.2 R20.2 U3.4 U5.2 U5.4 U8.5 U8.16 U9.3 | length 3660.9
  Top Layer w10: 650,255 652.2,252.8 U8.5 ; v1(878.99,252.63) 879.16,252.8 U8.16 1021.05,252.8 1032.13,263.88 1032.13,301.9 1034.78,304.56 1061.96,304.56 C15.2 ; 1028.06,262.32 1028.06,300.35
  Top Layer w20: v1(605,615) 605,730 835,960 v1(970,960)
  Top Layer w30: v1(474.22,89.22) 515,130 v1(515,165) ; v1(515,255) 650,255 ; C15.2 C16.2@1148.94,322.6 ; v1(1080,960) 1125,915 1125,725 1135,715 R20.2 1178.37,713.16 1178.37,686.63 1245,620 1340,620 U3.4
  Bottom Layer w20: R2.2 605,561.54 v1(605,615) ; 878.99,123.99 v1(878.99,252.63)
  Bottom Layer w30: v1(474.22,89.22) 498.43,65 850,65 880,95 880,251.62 v1(878.99,252.63) ; v1(515,165) v1(515,255) 589.03,255 599.72,265.69 602.22,263.19 621.26,263.19 631.54,273.46 ; R2.2 R16.2 603.46,346.54 610.47,339.53 U9.3@610.47,328.19 ; U9.3@625,325 625,280 631.54,273.46 ; C17.2 R19.2 631.54,273.46 ; U5.2 1010,1100 1015,1095 ; 1245,955 1245,945 1290,900 1290,645 1315.29,619.71 1340.29,619.71 U3.4
+12_1: C2.1 C6.2 C9.2 U5.3 U6.6 U7.2 U11.3 | length 2389.4
  Top Layer w10: v1(696.66,898.4) 788.26,990 1010,990 1050,1030 U7.2 1285,1030 1295,1020 1295,970 1320.31,944.69 1326.85,944.69 C9.2 ; v1(725,720) 725,690 925,490 960,490 1018.51,431.49 1113.05,431.49 1114.54,430 1175,430 1224.8,380.2 U11.3
  Bottom Layer w10: v1@719.59,720 v1(725,720)
  Bottom Layer w20: C2.1 698.03,741.56 v1@719.59,720
  Bottom Layer w30: C6.2 655,1130 ; U6.6 655,1130 ; C2.1 698.03,1111.97 ; U5.3 776.61,1190.55 698.03,1111.97 ; 655,1130 680,1130 698.03,1111.97
+12V: C7.2 C8.2 P2.7 P2.8 R1.1 R15.1 U6.1 | length 1611.4
  Top Layer w30: R15.1@80,371.54 80,320 115,285 325,285 362.79,247.21 362.79,245.07 375,232.86 375,225 P2.7@375,125 ; R15.1@85.31,371.54 85.31,377.77 54.81,377.77 45,387.58 45,635 ; R1.1 48.46,638.46 45,635 ; U6.1 45,1085 45,635
  Bottom Layer w30: U6.1 155,1126.54 164.88,1116.65 164.88,1114.69 169.57,1110 C7.2 171.54,1038.94 C8.2
ADDRESS_0: 
ADDRESS_1: 
ADDRESS_2: 
ADDRESS_3: 
ADDRESS_4: 
ADDRESS_5: 
BUTTON_DOWN: 
BUTTON_OK: 
BUTTON_UP: 
CURRENT: C19.2 R22.1 R37.1 U8.6 | length 458
  Top Layer w10: R37.1 C19.2 506.54,306.54 475,275 475,222.57 502.57,195 551.54,195 R22.1 560.77,204.23 584.23,204.23 607.2,227.2 U8.6
DIM1: 
DIM2: 
DIM3: 
DIM4: 
GATE: U7.3 U8.11 | length 1467.9
  Top Layer w10: v1@728.79,581.21 670,640 670,760 838.5,928.5 983.5,928.5 1070,1015 1160,1015 1182.4,992.6 U7.3 ; v1(775,500) 775,415 805,385 805,333.84 840,298.84 840,180 895.16,124.84 U8.11
  Bottom Layer w10: v1@728.79,578.79 728.79,576.21 775,530 v1(775,500)
  other v1: 732.5,580
GND: 
GND1: C2.2 C3.1 C4.1 C5.1 C6.1 C9.1 C10.1 C11.1 C13.1 C14.1 C15.1 C16.1 C17.1 C18.1 C19.1 P3.2 P4.1 Q1.3 Q2.3 R13.1 R18.1 R37.2 U4.3 U5.1 U6.4 U7.4 U8.1 U8.15 U9.1 U10.5 U11.2 | length 6133.4
  Top Layer w10: v1@645.2,384.8 650,380 650,368.95 663.95,355 717.64,355 U8.1 ; U8.15@921.47,227.2 U8.15 1067.8,227.2 1070,225 ; U7.4 1409.99,992.59 R18.1
  Top Layer w20: C15.1 1088.94,388.46 C16.1 1150,386.5 1159.69,376.81 1161.65,376.81 1195,343.46 1195,285 1175,265 1175,260 1165,250 1160,250 ; U11.2@1216.93,175 1218.74,176.81 1257.67,176.81 1268.86,187.99 1290.59,187.99 C10.1 ; C18.1 1306.54,203.94 C10.1 ; C11.1 1371.06,202.4 C10.1 ; U10.5@1515,205 v2@1515,500
  Top Layer w30: U4.3 470.88,345 494.34,368.46 540,368.46 560,368.46 620,368.46 635.39,368.46 645.2,378.28 645.2,384.8 v1(645.2,395.91) ; v1(635,115) 675,75 1018.5,75 1058.5,115 1060,115 1060,116.5 U11.2@1118.5,175 ; U11.2@1117.17,163.67 U11.2@1123.5,170 ; C14.1 1245,918.46 C13.1 1245,844.69 1249.69,840 P4.1 1380,875 1430,875 ; C9.1 C9.1@1410.31,930 ; R18.1 1415,934.69 C9.1@1410.31,930 ; v2(1505,500) 1490,515 1475,515 1430,560 1430,875 ; C9.1@1410.31,930 1442.31,930 1452.13,920.19 1452.13,899.81 1461.94,890 1490,890 v2(1505,875) 1430,875
  Top Layer w50: U6.4 455,1075 495,1035 v1(775,1035) v1(825,1035) 897.71,1107.71 1310.78,1107.71 v1(1377.98,1174.92) 1377.98,1224.49 v1(1378.41,1224.92)
  Bottom Layer w20: v1(645.2,395.91) 667.09,374.02 698.97,374.02 U9.1@702.4,370.59 ; U9.1@702.4,362.4 757.4,362.4 825,430 P3.2
  Bottom Layer w30: 451.97,901.97 410,860 410,405 U4.3 470,150 508.19,111.81 631.81,111.81 v1(635,115) R13.1 ; 451.97,903.03 C2.2 455,1008.03 455,1130 ; U6.4 455,1130 ; C6.1 455,1130 ; R13.1@698.46,110 C17.1@698.46,165 ; U5.1@883.27,1009.45 U5.1 ; C3.1 C4.1 1332.4,1058.94 C5.1 1380,1055 1505,930 v2(1505,875)
  other v2: 1585,500 1585,875
GND2: C7.1 C8.1 P2.5 P2.6 R6.2 R17.2 U2.3 U6.2 | length 1550.8
  Bottom Layer w30: R17.2 56.54,438.46 45,450 45,625 58.46,638.46 R6.2 90,640.43 94.69,645.12 96.65,645.12 111.54,660 U2.3 ; U6.2 255,1126.54 245.12,1116.65 245.12,1114.69 240.43,1110 C7.1 242.4,1106.06 C8.1 242.4,937.4 170,865 U2.3 ; P2.5@275,125 275,229.34 255,249.34 255,630 225,660 U2.3
I2C1_SCL: 
I2C1_SDA: 
L1: Q1.2 R7.1 U10.3 U10.4 | length 922.4
  Bottom Layer w20: R7.1 1781.69,240.2 v2@1800,221.88
  Bottom Layer w50: v2(1800,175) v2(1800,235) ; v2@1800,240.2 1800,1000
  other v2: 1875,900 1960,900 2045,900 1875,990 1960,990 2045,990 1875,1080 1960,1080 2045,1080 1875,1170 1960,1170 2045,1170
L1IN: P1.1 P1.2 U10.1 U10.2 | length 100
  Top Layer w50: P1.1 P1.2
LED_CH1: 
LED_CH2: 
LED_CH3: 
LED_CH4: 
LED_LEARN: 
LIVE1: 
LIVE2: 
LIVE3: 
LIVE4: 
N1: P1.5 P1.6 R10.1 | length 550.5
  Bottom Layer w20: R10.1 1737.01,115.39 1759.61,115.39 1830,45 2055,45 2082.6,72.6 2083.12,72.6 2090,79.48 P1.5 P1.6
NetC1_1: C1.1 D4.2 D5.2 D6.2 D7.1 R14.1 U1.4 U1.5 U1.6 | length 1105.6
  Top Layer w10: v1(1126.11,571.11) 1127.23,570 1160,570 1325,405 v1(1325,360)
  Bottom Layer w10: U1.6 U1.5 U1.4 1094.49,600.51 1123.89,571.11 v1(1126.11,571.11) ; D5.2@1324.88,320 1325,320.12 v1(1325,360)
  Bottom Layer w20: D4.2 1242.4,318.5 1251.73,318.5 1253.22,320 D5.2 ; D4.2@1240.43,315.67 1238.46,313.7 R14.1 1238.46,191.06 C1.1 1241.26,186.14 C1.1@1241.26,182.2 ; D7.1 C1.1@1241.26,182.2 ; D6.2 1267.4,160 1256.93,170.47 1252.99,170.47 C1.1@1241.26,182.2
NetC1_2: C1.2 D1.1 R3.2 R5.2 U1.8 | length 1053.2
  Top Layer w10: v1(960,565) 975,580 v1(975,780)
  Bottom Layer w10: R3.2@904.23,612.3 909.23,607.3 909.23,590.77 935,565 v1(960,565) 1065,565 1090,540 1135,540 1150,525 1150,485 1140,475 1105,475 1075,445 1075,370 1089.22,355.78 1090.23,355.78 1094.18,351.83 1094.18,324.56 D1.1 ; U1.8 940,835 975,800 v1(975,780)
  Bottom Layer w20: D1.1 1100,253.46 R5.2 1095,246.5 1104.69,236.81 1115.79,236.81 1143.07,209.53 1147.01,209.53 1162.6,193.94 C1.2
NetC10_2: C10.2 C11.2 U10.8 U11.1 | length 344
  Top Layer w10: U11.1 1296.65,115.94 C10.2@1306.06,106.54 ; C10.2 1371.06,127.6 C11.2 1413.46,131.54 1440,105 1440,70 1455,55 U10.8
NetC12_1: 
NetC12_2: 
NetC13_2: C13.2 P4.2 R20.1 R21.2 | length 244.8
  Top Layer w10: R21.2 C13.2 1245,716.54 R20.1 ; R20.1@1245.43,715 1260.12,729.69 1260.12,731.65 1268.46,740 P4.2
NetC18_2: C18.2 U10.6 | length 226
  Top Layer w10: C18.2@1374.71,275 1405,275 1440,240 1440,170 1455,155 U10.6
NetC20_1: 
NetC21_1: 
NetC27_1: 
NetC29_1: 
NetC29_2: 
NetD1_2: D1.2 D2.1 D3.1 D4.1 R4.2 | length 454
  Bottom Layer w10: D3.1 1332.03,240 1337.85,245.83 1337.85,255.37 1370,287.52 1370,375 1350.83,394.17 1329.57,394.17 D2.1
  Bottom Layer w20: D1.2 1152.95,411.26 1159.09,405.12 1160.31,405.12 1170,395.43 1170,394.21 1179.69,403.9 D4.1 1302.13,403.9 1306.02,400 D2.1
NetD2_2: D2.2 D5.1 R9.2 | length 161.3
  Bottom Layer w20: D5.1 D2.2 R9.2
NetD3_2: D3.2 D6.1 R12.2 | length 182.2
  Bottom Layer w20: D6.1 1415.83,160 1415,160.83 D3.2 1457.6,240 1478.07,260.47 1482.01,260.47 1497.6,276.06 R12.2
NetD7_2: D7.2 R5.1 U1.2 | length 1089.5
  Top Layer w10: v1(990.32,835.32) 992.68,837.68 992.68,852.68 1010,870 1045,870 1060,855 1060,690 1095,655 1095,559.8 1120,534.8 v1(1120,505)
  Bottom Layer w10: v1(990.32,835.32) 994.14,831.49 994.14,820.86 1030,785 U1.2 ; R5.1 1095,183.5 1080.31,198.19 1078.35,198.19 1060,216.54 1060,460 1106.17,506.17 1118.83,506.17 v1(1120,505)
  Bottom Layer w20: R5.1 1095,135 1119.17,110.83 1147.91,110.83 D7.2
NetD8_1: 
NetD9_1: 
NetD10_1: 
NetD11_1: 
NetD12_1: 
NetP17_6: 
NetP17_7: 
NetP17_8: 
NetP17_9: 
NetP17_10: 
NetP17_11: 
NetP17_12: 
NetP17_13: 
NetP17_14: 
NetP17_15: 
NetP17_16: 
NetP19_1: 
NetP19_2: 
NetQ1_1: Q1.1 Q2.1 R18.2 U7.5 | length 811.9
  Top Layer w10: U7.5 1410,1067.4 R18.2 1418.94,1072.4 1439.53,1092.99 1439.53,1096.93 1467.93,1125.34 1543.6,1125.34 Q1.1 1549.55,1130 1563.25,1116.3 1563.25,1106.75 1650,1020 1650,760 1568.25,678.25 1568.25,663.7 1554.55,650 Q2.1
NetR2_1: R2.1 U2.1 | length 66.5
  Bottom Layer w10: U2.1 R2.1
NetR3_1: R3.1 U3.1 | length 76.5
  Bottom Layer w10: R3.1 U3.1
NetR4_1: R4.1 R14.2 U1.3 | length 672.8
  Top Layer w10: v1(1203.79,483.79) 1206.21,483.79 1280,410 v1(1280,360)
  Bottom Layer w10: U1.3 1150,735 1160,725 1160,570 1205,525 1205,485 v1(1203.79,483.79) ; R4.1 1182.7,339.23 1194.23,339.23 1215,360 v1(1280,360)
  Bottom Layer w20: R4.1 1171.54,325 R14.2
NetR7_2: R7.2 R8.1 | length 90.1
  Bottom Layer w20: R7.2 1717.4,327.4 R8.1
NetR8_2: R8.2 R9.1 | length 70.2
  Bottom Layer w20: R9.1 R8.2
NetR10_2: R10.2 R11.1 | length 83.7
  Bottom Layer w20: R11.1 1572.6,125 R10.2
NetR11_2: R11.2 R12.1 | length 78.6
  Bottom Layer w20: R11.2 1570,277.6 R12.1
NetR15_2: R15.2 R17.1 U4.1 | length 203.5
  Top Layer w10: R15.2@96.54,445 R15.2 123.46,438.46 130,445 U4.1
  Bottom Layer w10: R17.1 90,373.5 104.69,388.19 113.19,388.19 U4.1
NetR19_1: R19.1 U8.4 U9.2 | length 209.3
  Top Layer w10: U8.4 717.84,278.34 v1(779.93,278.3) v1(779.93,278.3)
  Bottom Layer w10: R19.1@698.46,230 R19.1@699.8,231.34 ; R19.1@699.8,226.34 699.8,287.6 767.02,287.6 776.32,278.3 v1(779.93,278.3)
NetR22_2: R22.2 U10.7 | length 1231.7
  Top Layer w10: R22.2 560,70 600,30 1560,30 1585,55 1585,85 1565,105 U10.7
NetR27_2: 
NetR28_2: 
NetR29_2: 
NetR33_1: 
NetU1_1: U1.1 U3.2 | length 419.7
  Top Layer w10: v1(1030,835) 1030,710 995,675 995,565 U3.2
  Bottom Layer w10: v1(1030,835) U1.1
NEUTRAL1: 
NEUTRAL2: 
NEUTRAL3: 
NEUTRAL4: 
NTC: C14.2 R21.1 U8.7 | length 1433.7
  Top Layer w10: U8.7 771.61,201.61 v1(780,210) v1@774.59,210 ; v1(780,580) 690,670 690,760 845,915 990,915 1065,990 1134.72,990 1176.54,948.19 1176.54,846.54 R21.1
  Bottom Layer w10: v1(780,210) 810,240 810,355 867.4,412.4 867.4,457.56 825,499.96 825,535 v1(780,580)
OUT1: P1.3 P1.4 Q2.2 | length 571.2
  Top Layer w50: v2(1975,685) v2(1975,595) v2(1975,505) v2(1975,415) 1990,400 P1.4 P1.3
  other v2: 2060,415 2060,505 2060,595 2060,685
RX: 
RX2: P2.3 P2.4 R1.2 R6.1 U2.4 | length 657.2
  Top Layer w10: R1.2 118.46,571.54 130,560 U2.4 U2.4@160.61,569.39
  Bottom Layer w10: R6.1 101.54,560 U2.4 220,510 220,320 175,275 P2.3@175,125
SWCLK: 
SWCLK1: P3.1 U8.20 | length 97.6
  Top Layer w10: P3.1 925,372.36 930.77,366.59 930.77,356.9 932.51,355.16 U8.20
SWDIO: 
SWDIO1: P3.3 U8.19 | length 445.9
  Top Layer w10: P3.3 725,515 740,530 795,530 810,515 810,500 827.6,482.4 847.6,482.4 875,455 875,360 905.42,329.59 U8.19
TX: 
TX2: P2.1 P2.2 U4.2 | length 259.4
  Bottom Layer w10: P2.1@75,125 75,225 75,250 U4.2
USART1_DE: 
USART1_RX: 
USART1_TX: 
USART_RX: R16.1 U4.4 U8.9 | length 1387.9
  Top Layer w10: U4.4 505,445 525,465 525,590 505,610 430,610 415,625 415,700 430,715 530,715 565,680 565,537.63 707.63,395 765,395 790,370 790,329.75 825,294.75 825,180 795.43,150.43 U8.9
  Bottom Layer w10: U4.4 531.54,445 R16.1
USART_TX: U2.2 U8.8 | length 761.5
  Top Layer w10: U2.2 477.64,652.36 512.64,652.36 545,620 545,538.54 703.54,380 755,380 775,360 775,325.65 810,290.65 810,186.52 799.51,176.02 U8.8
ZEROCROSS: R13.2 U3.3 U8.10 | length 2044.3
  Top Layer w10: v1(685,580) 688.83,576.17 688.83,566.17 706.21,548.79 828.24,548.79 860.21,516.82 v1(860.21,512.37) ; U8.10 814.87,124.84 831.68,141.65 v1(833.35,141.65)
  Bottom Layer w10: v1(685,580) 765,660 765,840 840,915 1213.89,915 1260,868.89 1260,600 U3.3 ; R13.2 805,115 831.65,141.65 v1(833.35,141.65) 833.35,358.35 882.6,407.6 882.6,492.4 862.63,512.37 v1(860.21,512.37)
pads on no net: U1.7 U7.1 U8.2 U8.3 U8.12 U8.13 U8.14 U8.17 U8.18
copper on no net: | length 301.3
  Top Layer w10: 942.2,150.43 942.32,150.32 1000.13,150.32 ; 942.2,176.02 998.98,176.02 1000,175 ; 942.2,201.61 998.39,201.61 1000,200 ; 942.2,278.39 1003.39,278.39 1005,280 ; 942.2,303.98 1003.98,303.98 1005,305

## Keep-outs
Keep-Out Layer:
  the board outline again, w10

## Other copper
Top Layer:
  rectangle: 990.46,194.02 1025.46,209.33
  rectangle: 989.89,142.8 1024.89,158.11
  rectangle: 990.29,168.02 1025.29,183.33
  rectangle: 989.83,270.95 1014.79,286.26
  rectangle: 990.04,296.8 1015,312.11
  rectangle net GND1: 1033.53,142.61 1068.53,157.92
  rectangle net GND1: 1033.91,167.93 1068.91,183.24
  rectangle net GND1: 1034.16,193.69 1069.16,209
  rectangle net +3V3_1: 1023.06,296.9 1061.96,312.21
  rectangle net GND1: 1045,100 1185,270
  rectangle net GND1: 1475,460 1615,530
  rectangle net GND1: 1475,845 1620,930
  rectangle net L1: 1675,145 1825,260
  rectangle net L1IN: 1665,45 1920,115
Bottom Layer:
  region net GND1: 1400,1235 1330,1235 1330,1150 1400,1150
  rectangle net GND1: 765,970 910,1055
  rectangle net GND1: 1475,465 1615,910
  rectangle net OUT1: 1895,350 2120,745
  rectangle net L1: 1775,830 2105,1230
  rectangle net +3V3_1: 950,940 1260,1255

## Silkscreen, mask and mechanical layers (free items; w line width, h text height)
Top Overlay:
  lines w10: 760,840 760,635 775,620 835,620 945,510 980,510 995,495 995,130 1050,130 1060,140 1060,300 1040,320 1000,320
  text "A0" at 780,807.18 h20
  text "A1" at 780,765.38 h20
  text "A2" at 780,723.59 h20
  text "A3" at 780,681.79 h20
  text "A4" at 780,640 h20
Top Paste:
  rectangle: 1033.46,142.6 1047.57,157.93
  rectangle: 1033.86,167.94 1047.97,183.27
  rectangle: 1034.14,193.7 1048.25,209.03
  rectangle: 1005.21,142.74 1024.92,158.14
  rectangle: 1005.59,168 1025.3,183.41
  rectangle: 1005.82,193.99 1025.53,209.4
  rectangle: 1023.06,270.86 1037.17,286.19
  rectangle: 1023.08,296.97 1037.19,312.3
  rectangle: 995.45,296.77 1014.98,312.1
  rectangle: 995.07,270.86 1014.78,286.27
Top Solder:
  rectangle: 1020.14,267.44 1039.65,289.48
  rectangle: 1020.26,293.01 1039.65,314.76
  rectangle: 988.66,293.01 1017.08,314.76
  rectangle: 988.4,267.46 1016.82,289.21
  rectangle: 1030.88,190.5 1054.56,212.25
  rectangle: 1030.96,164.72 1054.64,186.48
  rectangle: 988.58,190.59 1027.92,212.47
  rectangle: 988.68,165.07 1027.84,186.94
  rectangle: 1030.96,139.18 1054.64,160.94
  rectangle: 988.54,139.18 1027.8,161.06